# Altium PCB AUTO_CUT_OFF_TESTER_V01_PCB.PcbDoc
Units mil, origin at the board's own origin, x right, y up, seen from the top; angles counter-clockwise.
Board outline 2425.03 x 1336.77 mil, 2 copper layers (Top Layer, Bottom Layer); 30 components, 20 nets, 118 pads, 0 vias.
Unrouted connection lines stored in the file: 27.
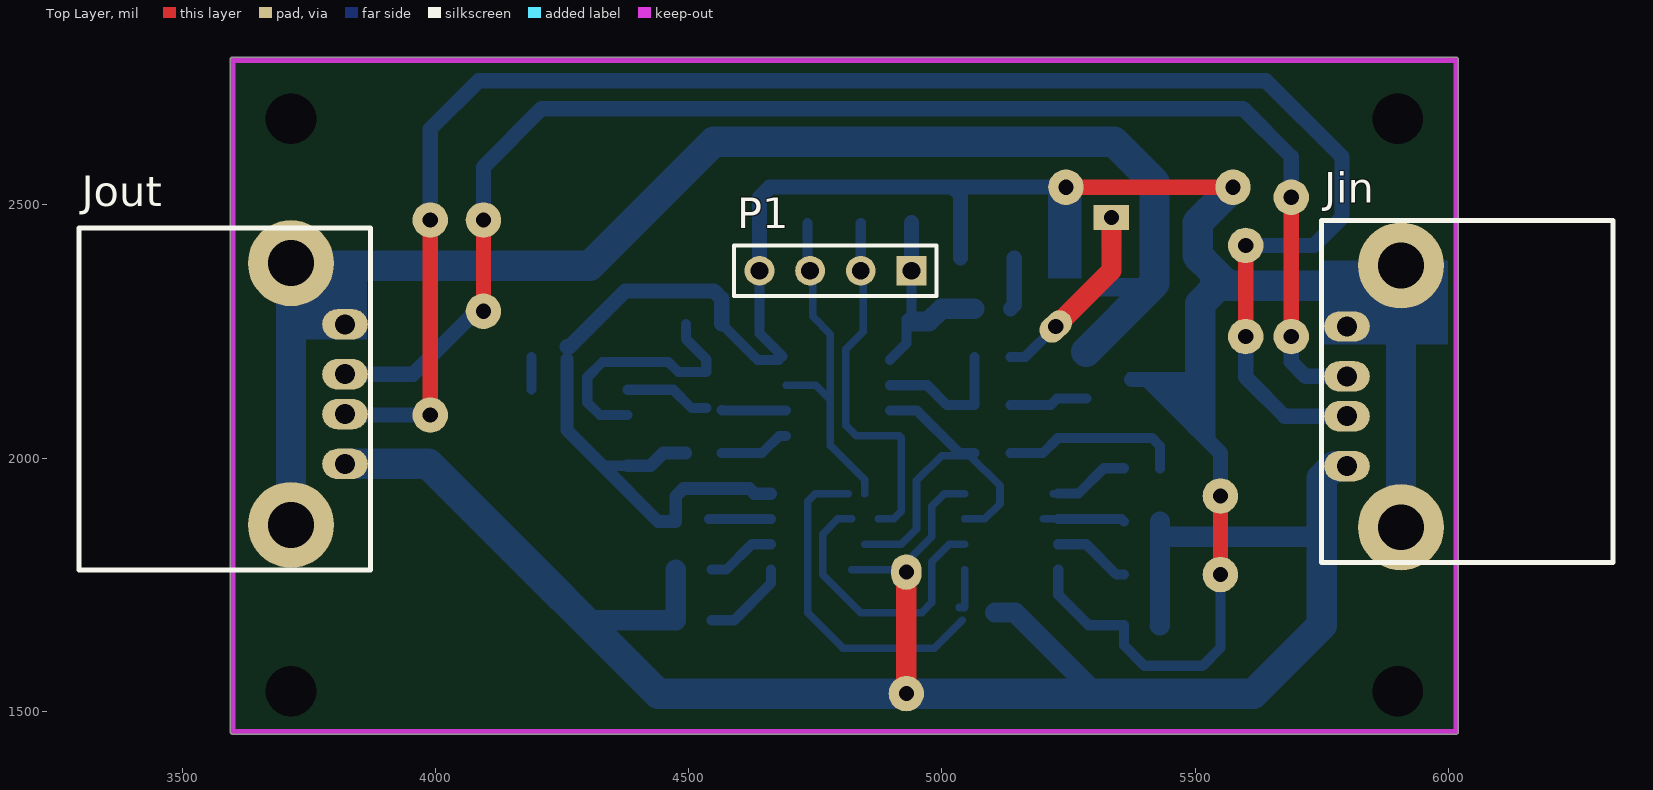
[diagram p0: Top Layer view]
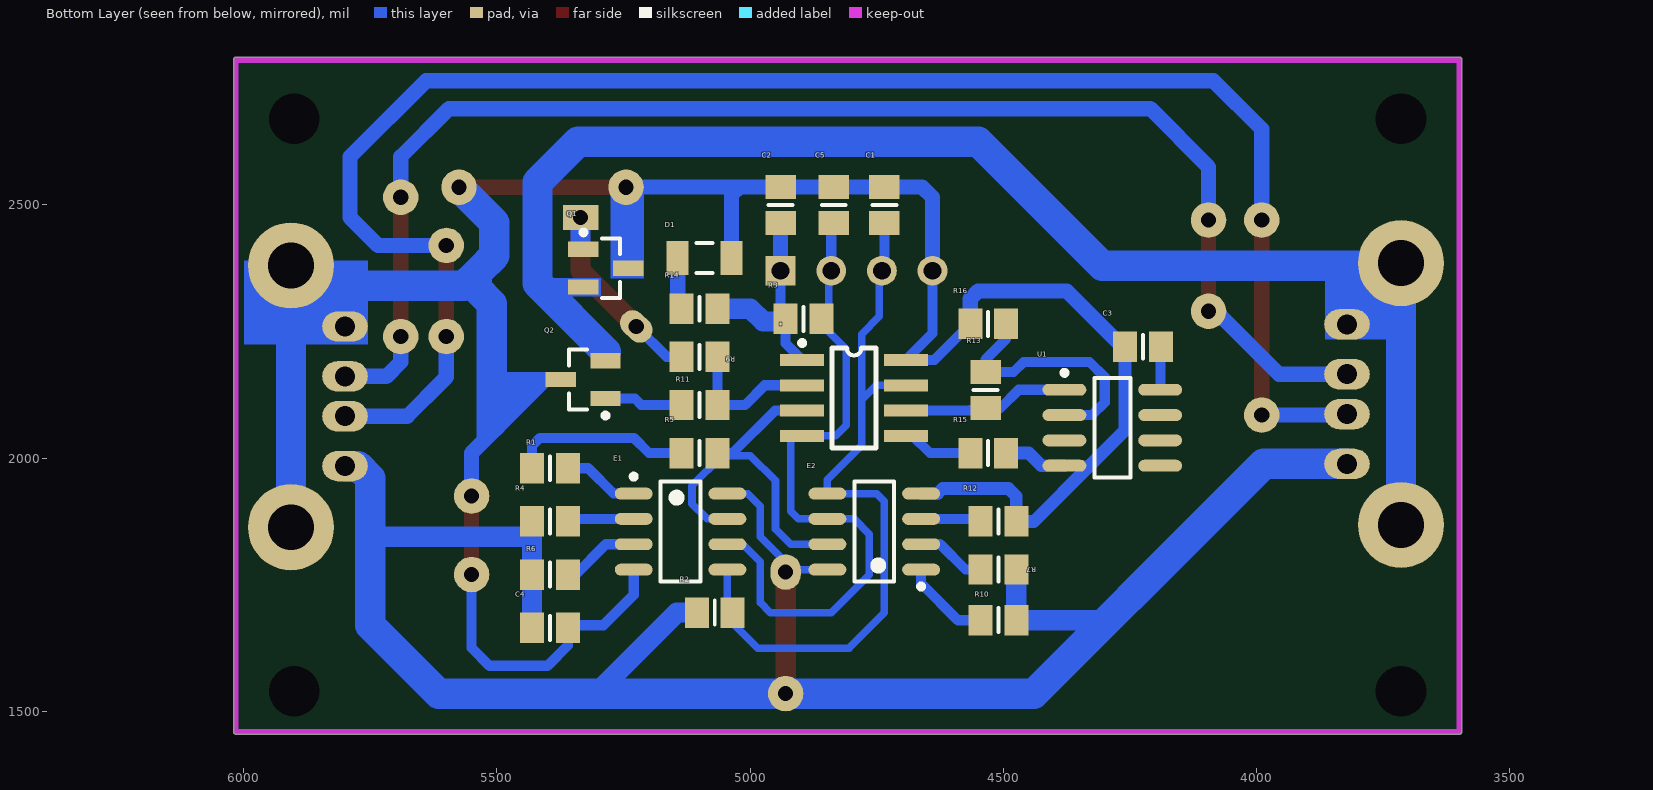
[diagram p1: Bottom Layer view, seen from below]

## Layer stack, top to bottom
Top Solder: solder mask 0.4, Solder Resist, Dk 3.5
Top Layer: signal copper 1.4
Dielectric 1: dielectric 12.6, FR-4, Dk 4.8
Bottom Layer: signal copper 1.4
Bottom Solder: solder mask 0.4, Solder Resist, Dk 3.5

## Board outline
3595.06,1460.87 cw(c3600,1461.74) 3594.99,1461.74 3594.98,2786.74 cw(c3600,2786.74) 3600,2791.76 6015,2791.76 cw(c6015,2786.74) 6020.01,2786.74 6020.01,2786.71 ccw(c6015,2786.74) 6020.02,2786.74 6020.01,2786.71 6020.02,1461.74 cw(c6015,1461.74) 6019.94,1460.87 cw(c6015,1460) 6020.02,1460 cw(c6015,1460) 6015,1454.98 3600,1454.98 cw(c3600,1460)

## Design rules (kind name [scope] priority, off if disabled: settings)
AssemblyTestPointUsage [All] p1 off:
AssemblyTestpoint [All] p1 off: testpointundercomponent=TRUE minsize=40 maxsize=100 preferedsize=60 minholesize=0 maxholesize=40 preferedholesize=32 testpointgrid=1 usegrid=TRUE gridtolerance=0.01 allowsidetop=TRUE allowsidebottom=TRUE
Clearance [All] p1: gap=10 ignorepadtopadclearanceinfootprint=FALSE
FabricationTestPointUsage [All] p1 off: valid=0 allowmultiple=FALSE
FabricationTestpoint [All] p1 off: side=3 testpointundercomponent=TRUE minsize=40 maxsize=100 preferedsize=60 minholesize=0 maxholesize=40 preferedholesize=32 testpointgrid=1 allowsidetop=TRUE allowsidebottom=TRUE usegrid=TRUE gridtolerance=0.01
Height [All] p1 off: minheight=0 maxheight=1000 prefheight=500
HoleSize [All] p1 off: absolutevalues=TRUE maxlimit=100 minlimit=1 maxpercent=80.000 minpercent=20.000
HoleToHoleClearance [All] p1 off: gap=10 allowstackedmicrovias=TRUE
LayerPairs [All] p1 off: enforce=TRUE
MinimumSolderMaskSliver [All] p1 off: minsoldermaskwidth=10
PasteMaskExpansion [All] p1 off: expansion=0
PlaneClearance [All] p1 off: clearance=20
PlaneConnect [All] p1 off: planeconnectstyle=Relief reliefexpansion=20 reliefentries=4 reliefconductorwidth=10 reliefairgap=10
PolygonConnect [All] p1 off: connectstyle=Relief reliefconductorwidth=10 reliefentries=4 polygonreliefangle="90 Angle" airgapwidth=10
RoutingVias [All] p1: holewidth=28 width=50 viastyle="Through Hole" minholewidth=28 minwidth=50 maxholewidth=28 maxwidth=50
SilkToSilkClearance [All] p1 off: silktosilkclearance=10
SilkToSolderMaskClearance [IsPad] p1 off: minsilkscreentomaskgap=10 clearancetoexposedcopper=TRUE
SolderMaskExpansion [All] p1 off: expansion=4
Width [All] p1 off: maxlimit=10 minlimit=10 preferedwidth=10
16 further rules are at their usual default settings.

## Components (designator, comment, footprint, x,y, rotation, side; value= is the part's Value field where it differs from the comment)
* "HT66F002" SO8 4897.36,2193.82 r180 bottom
C1 "Cap Semi" 6-0805_N 4735,2500 r270 bottom value=100NF
C2 "Cap Semi" 6-0805_N 4940,2500 r270 bottom value=100NF
C3 "Cap Semi" 6-0805_N 4224.57,2220 r180 bottom value=100NF
C4 "Cap Semi" 6-0805_N 5395,1665 r0 bottom value=100NF
C5 "Cap Semi" 6-0805_N 4835,2500 r270 bottom value=100NF
D1 "LED2" C1206 5090,2395 r180 bottom
E1 "AT24C256 EEPROM" SOIC8_L 5137.48,1855 r180 bottom
E2 "AT24C256 EEPROM" SOIC8_L 4755,1855 r0 bottom
Jin "USB_CON_A" USB_CON_A 5800,2259.94 r90 top
Jout "USB_CON_A" USB_CON_A 3821.69,1988.54 r270 top
P1 "Header 4" HDR1X4 4940,2370 r180 top
Q1 "NMOS-2" SOT-23_N 5285,2375 r180 bottom
Q2 "NMOS-2" SOT-23_N 5330,2155 r0 bottom
R1 "Res3" 6-0805_N 5395.43,1980 r0 bottom value=10K
R2 "Res3" 6-0805_N 5070,1695 r0 bottom value=4.7k
R3 "Res3" 6-0805_N 4895,2275 r0 bottom value=4.7k
R4 "Res3" 6-0805_N 5395,1875 r0 bottom value=10K
R5 "Res3" 6-0805_N 5100,2010 r0 bottom value=10K
R6 "Res3" 6-0805_N 5395.43,1770 r0 bottom value=10K
R7 "Res3" 6-0805_N 4510,1780 r180 bottom value=10K
R9 "Res3" 6-0805_N 5100,2200 r180 bottom value=1K
R10 "Res3" 6-0805_N 4510,1680 r180 bottom value=10K
R11 "Res3" 6-0805_N 5100,2105 r180 bottom value=1k
R12 "Res3" 6-0805_N 4510,1875 r0 bottom value=1K
R13 "Res3" 6-0805_N 4535,2134.57 r90 bottom value=10K
R14 "Res3" 6-0805_N 5100,2295 r180 bottom value=330
R15 "Res3" 6-0805_N 4530,2010 r0 bottom value=10K
R16 "Res3" 6-0805_N 4530,2265 r180 bottom value=1K
U1 "LMV358AD" SO8_N 4285,2060 r180 bottom

## Footprints (in the part's own frame and the unit in brackets; to place one, negate y for a bottom-side part, rotate by r counter-clockwise, add the part's x,y. Pads: shape width x height; smd on the part's side, far side on the other; paste and mask are expansions set on the pad)
6-0805_N [mm] "Chip Resistor, Body 2.0x1.2mm, IPC Medium Density"
  rect 1.2x1.524 smd: 1(-0.9,0) 2(0.9,0)
  silkscreen extent 0,-0.6 0,0.6, body extent -1.07,-0.7 1.07,0.7, height 0.7
C1206 [mm] "Chip Capacitor, Body 3.2x1.6mm, IPC High Density"
  rect 1.1x1.7 smd: 1(-1.35,0) 2(1.35,0)
  silkscreen extent -0.4,-0.75 0.4,0.75, body extent -1.7,-0.9 1.7,0.9, height 1.3
HDR1X4 [mm] "Connector; Header; 4 Position"
  rect 1.5x1.5 hole 0.9: 1(0,0)
  round 1.5 hole 0.9: 2(2.54,0) 3(5.08,0) 4(7.62,0)
  silkscreen extent -1.27,-1.27 8.89,1.27
SO8 [mm]
  rect 2.2x0.6 smd: 1(0,0) 2(0,-1.27) 3(0,-2.54) 4(0,-3.81) 5(5.2,-3.81) 6(5.2,-2.54) 7(5.2,-1.27) 8(5.2,0)
  round 0 on Mech3: ""(2.6,-3.205) ""(2.6,-0.605)
  silkscreen extent -0.12,-4.4 3.7,0.97
SO8_N [mm] "SOIC, 8-Leads, Body 4.9x3.9mm, Pitch 1.27mm, IPC Medium Density"
  oval 2.2x0.6 smd: 1(-2.4,1.905) 2(-2.4,0.635) 3(-2.4,-0.635) 4(-2.4,-1.905) 5(2.4,-1.905) 6(2.4,-0.635) 7(2.4,0.635) 8(2.4,1.905)
  silkscreen extent -2.53,-2.5 0.9,2.88, body extent -1.95,-2.45 1.95,2.45, height 1.75
SOIC8_L [mm] "SOIC, 8-Leads, Body 4.9x3.9mm, Pitch 1.27mm, IPC High Density"
  oval 1.9x0.6 smd: 1(-2.35,1.905) 2(-2.35,0.635) 3(-2.35,-0.635) 4(-2.35,-1.905) 5(2.35,-1.905) 6(2.35,-0.635) 7(2.35,0.635) 8(2.35,1.905)
  silkscreen extent -2.48,-2.5 1,2.88, body extent -2,-2.5 2,2.5, height 1.75
SOT-23_N [mil] "SOT23, 3-Leads, Body 2.9x1.3mm, Pitch 0.95mm, Lead Span 2.5mm, IPC Medium Density"
  rect 60x30 smd: 1(-44.29,37.4) 2(-44.29,-37.4) 3(44.29,0)
  silkscreen extent -49,-59 28,76, body extent -28,-59 28,59, height 43
USB_CON_A [mm]
  oval 1.524x2.286 hole 1: 1(-7,0) 2(-4.5,0) 3(-2.5,0) 4(0,0)
  round 4.318 hole 2.3: 5(3.06,-2.71) 6(-10.07,-2.71)
  silkscreen extent -11.84,-13.33 5.31,1.27

## Part data
C1 C2 C3 C4 C5: "Capacitor (Semiconductor SIM Model)", LatestRevisionDate=29-May-2009, LatestRevisionNote="IPC-7351 Footprint Added.", PackageDescription="Chip Capacitor", PackageReference=C1206, Published=8-Jun-2000, Publisher="Altium Limited"
D1: "Typical RED, GREEN, YELLOW, AMBER GaAs LED", LatestRevisionDate=17-Jul-2002, LatestRevisionNote="Re-released for DXP Platform.", PackageDescription="SM LED; 2 Flat Leads", PackageReference=3.2X1.6X1.1, PackageVersion=Feb-2002, Published=8-Jun-2000, Publisher="Altium Limited"
P1: "Header, 4-Pin", LatestRevisionDate=17-Jul-2002, LatestRevisionNote="Re-released for DXP Platform.", Publisher="Altium Limited"
Q1 Q2: "N-Channel Power MOSFET", ComponentLink1Description="Manufacturer Link", ComponentLink1URL=http://www.irf.com/, DatasheetVersion=PD-9.814, LatestRevisionDate=17-Jul-2002, LatestRevisionNote="Re-released for DXP Platform.", Note="Pin 2 is electrically connected to pin 4.", PackageDescription="TO, Thru-Hole, Vertical, Heatsink Mounted; 3 In-Line Leads; Pitch 2.54 mm", PackageReference=TO-220AB, PackageVersion=Feb-1997, Published=8-Jun-2000, Publisher="Altium Limited"
R1 R2 R3 R4 R5 R6 R7 R9 R10 R11 R12 R13 R14 R15 R16: "Resistor", LatestRevisionDate=29-May-2009, LatestRevisionNote="IPC-7351 Footprint Added.", PackageDescription="Chip Resistor", PackageReference=J1-0603, Published=8-Jun-2000, Publisher="Altium Limited"
U1: library part LM358AD, "Low-Power Dual Operational Amplifier", Code_IPC=SOIC127P600-8, Code_JEDEC=MS-012-AA, ComponentLink1Description="Manufacturer Link", ComponentLink1URL=http://www.st.com/, ComponentLink2Description=Datasheet, ComponentLink2URL=http://www.st.com/stonline/products/literature/ds/2163/lm358.pdf, DatasheetVersion=Jun-1998, LatestRevisionDate=13-Apr-2006, LatestRevisionNote="IPC-7351 Footprint Added.", PackageDescription="8-Pin Small Outline Integrated Circuit 1.27 mm Pitch", PackageReference=SO8, PackageVersion=Dec-2002, Published=24-Aug-2001, Publisher="Altium Limited"

## Free pads (board coordinates)
  round 70 hole 30: 2(5690,2240) 3(5600,2240) 4(5690,2515) 5(3990,2470) 5(5600,2420) 6(3990,2085) 7(4095,2470) 8(4095,2290) 9(4930,1535) 11(5550,1770) 12(5550,1925) 13(5245,2535) 15(5575,2535)
  oval 60x70 hole 30: 10(4930,1775)
  oval 70x50 hole 30 rot 45: 15(5225,2260)
  rect 70x50 hole 30: 15(5335,2475)
  round 0 hole 100: 16(5900,2670) 17(5900,1540) 18(3715,1540) 19(3715,2670)

## Nets (pads, with @x,y where several pads share a name; then routed paths per layer and width w, separated by ;. In a path a pad name is that pad's centre, name@x,y a point inside that pad or via, vN(x,y) a via of type N, cw(c..) or ccw(c..) an arc to the next point about the centre after c; other vN are vias at no path point)
D+: Jin.3 Jout.2 pad.2 pad.4 pad.7 pad.8 | length 2827.8
  Top Layer w30: pad.8 pad.7 ; pad.2 pad.4
  Bottom Layer w30: Jout.2 3955.71,2165.71 4080,2290 pad.8 ; pad.7 4095,2575 4210,2690 5595,2690 5690,2595 pad.4 ; pad.2@5694.46,2231.89 pad.2 5690,2190 5718.48,2161.52 Jin.3
D-: Jin.2 Jout.3 pad.3 pad.5 pad.6 | length 3522
  Top Layer w30: pad.6 pad.5@3990,2470 ; pad.3 pad.5@5600,2420
  Bottom Layer w30: Jout.3 3823.66,2085 pad.6 ; pad.5@3990,2470 3990,2650 4085,2745 5640,2745 5790,2595 5790,2475 5735,2420 5600,2420 pad.5@5605,2425 ; pad.3 5600,2160 ; 5638.61,2121.39 5600,2160 ; Jin.2 5677.22,2082.78 5600,2160
GND: *.8 C1.1 C2.1 C3.1 C4.1 C5.1 D1.2 E1.4 E2.4 Jin.4 Jin.5 Jin.6 P1.4 pad.11 pad.12 pad.13 pad.15@5575,2535 Q1.3 Q2.3 R12.1 R15.1 R16.1 U1.4 | length 5484.2
  Top Layer w30: pad.13 pad.15@5575,2535 ; pad.11 pad.12
  Bottom Layer w20: 4330,1985 U1.4 ; R16.1 4636.61,2193.82 *.8@4678.82,2193.82 ; P1.4 4640,2321.46 4640,2246.46 *.8@4685.73,2200.73 ; E1.4 5230,1730 5290,1670 C4.1@5359.57,1670 ; C4.1 5359.57,1630.43 5400,1590 5515,1590 5550,1625 pad.11 pad.11@5550,1780
  Bottom Layer w25: C3.1@4260,2195 4260,2055 4330,1985 4440,1875 R12.1 4474.57,1924.57 4490,1940 4620,1940 4630,1930 E2.4 ; U1.4 4425,1985 4450,2010 R15.1
  Bottom Layer w30: C3.1 4265,2220 4375,2330 4550,2330 4565.43,2314.57 R16.1 ; P1.4 4640,2515 4660.43,2535.43 C1.1 C5.1 C2.1 5021.42,2535.43 ; D1.2 5036.85,2520 5021.42,2535.43 ; pad.13@5255,2535.43 5021.42,2535.43 ; Q2.3 5405,2155 5550,2010 pad.12
  Bottom Layer w60: 5245,2430 pad.13 ; 5510,2070 5510,2305 5540,2335 5540,2365 5565,2340 5866.28,2340 Jin.5@5900.43,2374.16 ; 5535,2370 5505,2400 5505,2465 pad.15@5575,2535 ; Jin.6@5906.69,1845.71 Jin.6 5906.69,2362.64 5897.8,2371.53 5895.17,2374.16 Jin.5@5900.43,2374.16 ; Jin.5@5906.69,2374.16 Jin.5@5900.43,2374.16 ; Jin.5 Jin.5@5900.43,2374.16
GNDOUT: *.5 Jout.1 Jout.5 Jout.6 Q1.2 Q2.2 R15.2 U1.3 | length 3048.7
  Bottom Layer w20: R15.2 4645,2010 4678.82,2043.82 *.5
  Bottom Layer w60: Jout.5 Jout.6 Jout.6@3720,2380 ; Jout.1 3821.69,2278.31 Jout.6@3720,2380 ; 5285,2210 5420,2345 5420,2545 5340,2625 4550,2625 4305,2380 Jout.6@3720,2380
ICPCK: *.4 C5.2 E1.6 E2.6 P1.2 R3.1 | length 1294.4
  Bottom Layer w15: E2.6@4822.52,1880 4795,1880 4765,1850 4765,1770 4840,1695 4960,1695 4980,1715 4980,1795 5015,1830 E1.6 ; P1.2@4845,2370 4845,2250 4810,2215 4810,2065 4831.18,2043.82 *.4 4916.18,2043.82 4920,2040 4920,1895 4905,1880 E2.6@4875,1880
  Bottom Layer w20: P1.2 C5.2@4840,2464.57
ICPDA: *.7 C1.2 E1.5 E2.5 P1.3 R2.1 | length 1426.6
  Bottom Layer w15: *.7 4751.18,2143.82 4780,2115 ; P1.3@4745,2370 4745,2280 4780,2245 4780,2115 ; E2.5@4815,1930 4750,1930 4735,1915 4735,1695 4805,1625 4985,1625 R2.1@5040,1680 ; E2.5 4847.52,1957.48 4780,2025 4780,2115 ; R2.1@5034.57,1705 5044.57,1705 5044.96,1705.39 E1.5
  Bottom Layer w20: C1.2 4735,2375 P1.3
IOUT: *.6 R13.1 U1.1 | length 298.1
  Bottom Layer w20: U1.1 4470,2135 4505.87,2099.13 R13.1 ; 4565.43,2095 4566.61,2093.82 *.6
MOSCONT: *.2 R9.2 R11.2 | length 278.3
  Bottom Layer w20: *.2 4971.18,2143.82 5010,2105 R11.2 R9.2
NetD1_1: D1.1 R14.1 | length 103.2
  Bottom Layer w30: R14.1 5143.15,2302.72 D1.1
NetE1_1: E1.1 R1.1 | length 160.7
  Bottom Layer w15: E1.1@5220,1930 E1.1
  Bottom Layer w20: E1.1 5270,1930 5320,1980 R1.1
NetE1_2: E1.2 R4.1 | length 161.6
  Bottom Layer w15: E1.2@5200,1880 E1.2
  Bottom Layer w20: E1.2 5354.57,1880 R4.1
NetE1_3: E1.3 R6.1 | length 154.9
  Bottom Layer w20: E1.3 5285,1830 5345,1770 R6.1
NetE2_1: E2.1 R10.1 | length 174.6
  Bottom Layer w20: R10.1 4590,1680 4662.48,1752.48 E2.1
NetE2_2: E2.2 R7.1 | length 137.8
  Bottom Layer w20: R7.1 4575,1780 4625,1830 E2.2
NetE2_3: E2.3 R12.2 | length 122.5
  Bottom Layer w20: R12.2@4540,1880 E2.3
NetQ1_1: pad.15@5225,2260 pad.15@5335,2475 Q1.1 R9.1 | length 431.9
  Top Layer w40: pad.15@5225,2260 5335,2370 pad.15@5335,2475
  Bottom Layer w20: R9.1 5165,2200 pad.15@5225,2260
  Bottom Layer w40: Q1.1@5335,2418.11 pad.15@5335,2475
NetQ2_1: Q2.1 R11.1 | length 155.5
  Bottom Layer w20: R11.1 5215,2105 5227.6,2117.6 Q2.1
NetR13_2: R13.2 R16.2 U1.2 | length 507.3
  Bottom Layer w20: U1.2 4325,2085 4300,2110 4300,2160 4330,2190 4460,2190 4480,2170 R13.2 4535,2195 4494.57,2235.43 R16.2
VCC: *.1 C2.2 C3.2 C4.2 E1.8 E2.8 Jin.1 Jout.4 P1.1 pad.9 pad.10 R1.2 R2.2 R3.2 R4.2 R5.2 R6.2 R7.2 R10.2 R14.2 U1.8 | length 5011.2
  Top Layer w40: pad.9 pad.10
  Bottom Layer w15: E2.8@4822.52,1780 E2.8 4915,1780 4980,1845 4980,1905 5005,1930 E1.8
  Bottom Layer w20: U1.8@4189.57,2135.94 C3.2@4189.57,2200 ; *.1 4930.43,2226.89 R3.2 ; R3.2@4940,2270 P1.1 ; R5.2 5200,2010 5230,2040 5415,2040 5430.87,2024.13 R1.2
  Bottom Layer w30: P1.1 C2.2
  Bottom Layer w40: 4320,1680 R10.2 R7.2 ; R3.2@4940,2270 4974.57,2270 4999.57,2295 R14.2 ; R2.2 5145,1695 5305,1535 5325,1535 ; C4.2@5430.43,1670 5430.87,1670.43 R4.2@5430.87,1875 ; R4.2@5430.87,1845 5748.43,1845
  Bottom Layer w60: Jout.4 3986.46,1988.54 4066.46,1908.54 ; 4080,1895 4066.46,1908.54 ; Jin.1 5774.35,1984.35 5750,1960 5750,1670 5615,1535 pad.9 4440,1535 4066.46,1908.54
W/P: *.3 E1.7 E2.7 R5.1 | length 739.9
  Bottom Layer w15: E2.7 4920,1830 4950,1860 4950,1955 5000,2005 5055,2005 5115,1945 5115,1910 5085,1880 E1.7
  Bottom Layer w20: *.3 4951.18,2093.82 5035,2010 R5.1
pads on no net: *. U1.5 U1.6 U1.7

## Polygon pours and split planes (outlines as drawn)
no net on Bottom Layer "Bottom Layer-No Net" (solid, pour order 0): 5365,2420

## Keep-outs
Keep-Out Layer:
  lines w10: 3600,1460 6015,1460 ; 3600,1461.74 3600,2785 6015,2785 6015,1461.74

## Other copper
Bottom Layer:
  region net GND: 5998.61,2390 5790,2390 5755,2390 5755,2225 5998.61,2225
  region net GNDOUT: 3715,2385 3720,2390 3865,2390 3865,2235 3715,2235
  region net GND: 5365.71,2170 5485,2170 5485,2095 5480,2090
  region net GNDOUT: 5295,2320 5295,2355 5420,2355 5420,2320
  region net GND: 5210,2355 5210,2525 5275,2525 5275,2355
  region: 5480,2310
  region net GND: 5540,2095 5540,2040 5520,2040 5480,2080